# Altium PCB ES_PRJ_6C_2L_2026.PcbDoc
Units mm, origin at the board's own origin, x right, y up, seen from the top; angles counter-clockwise.
Board outline 120 x 60 mm, 2 copper layers (Top Layer, Bottom Layer), stack 1.62 mm thick; 67 components, 48 nets, 226 pads, 74 vias.
Unrouted connection lines stored in the file: 48.
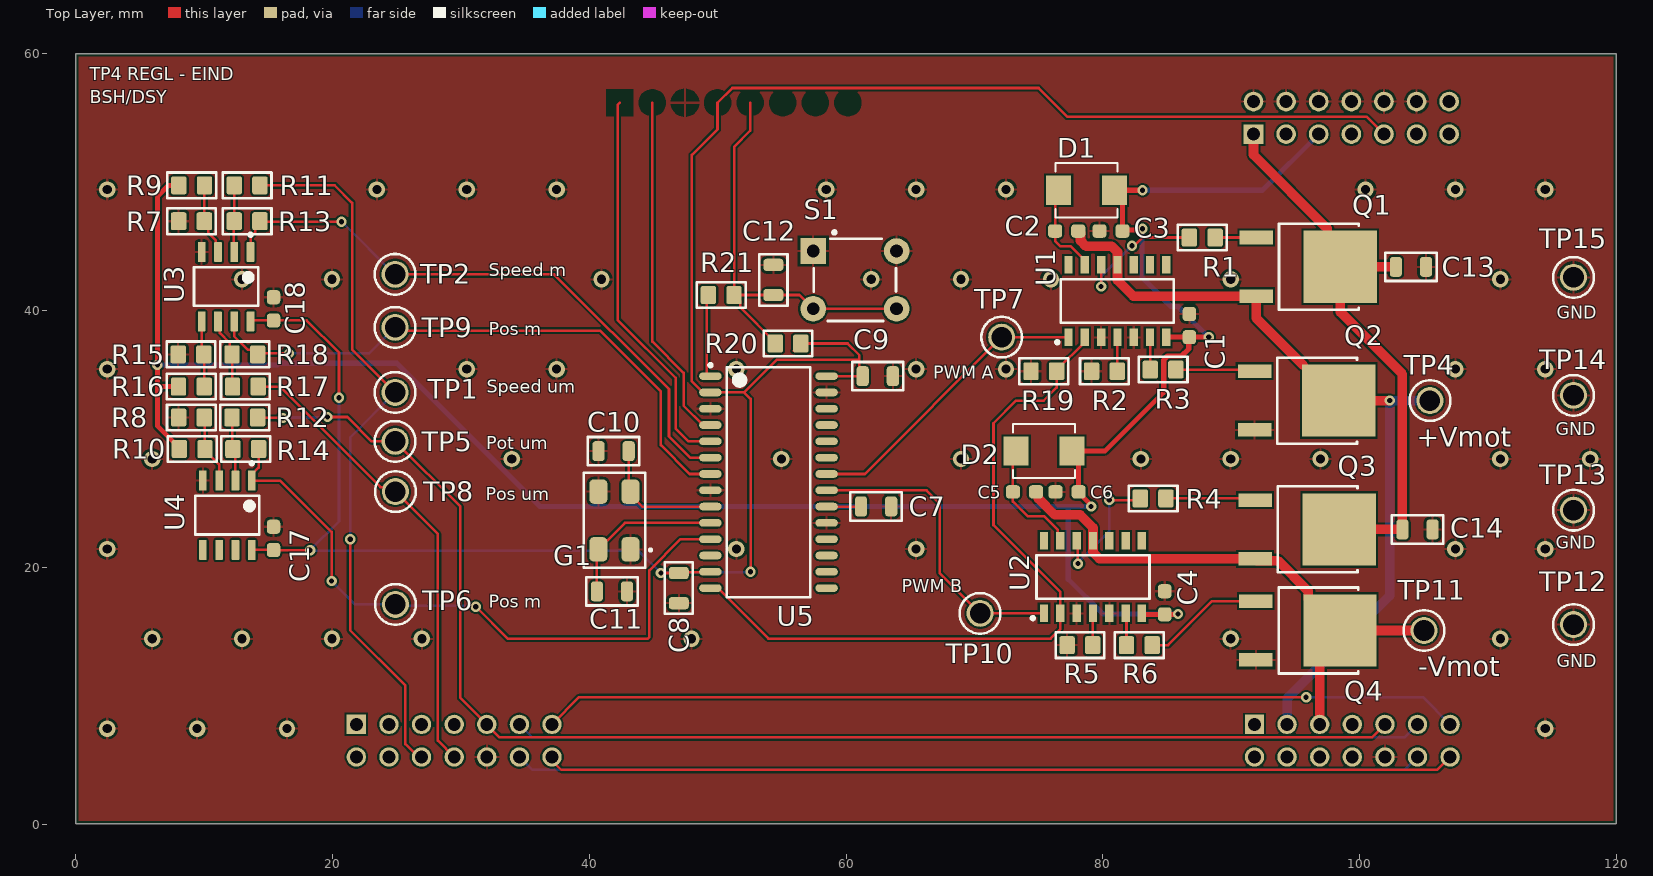
[diagram p0: Top Layer view]
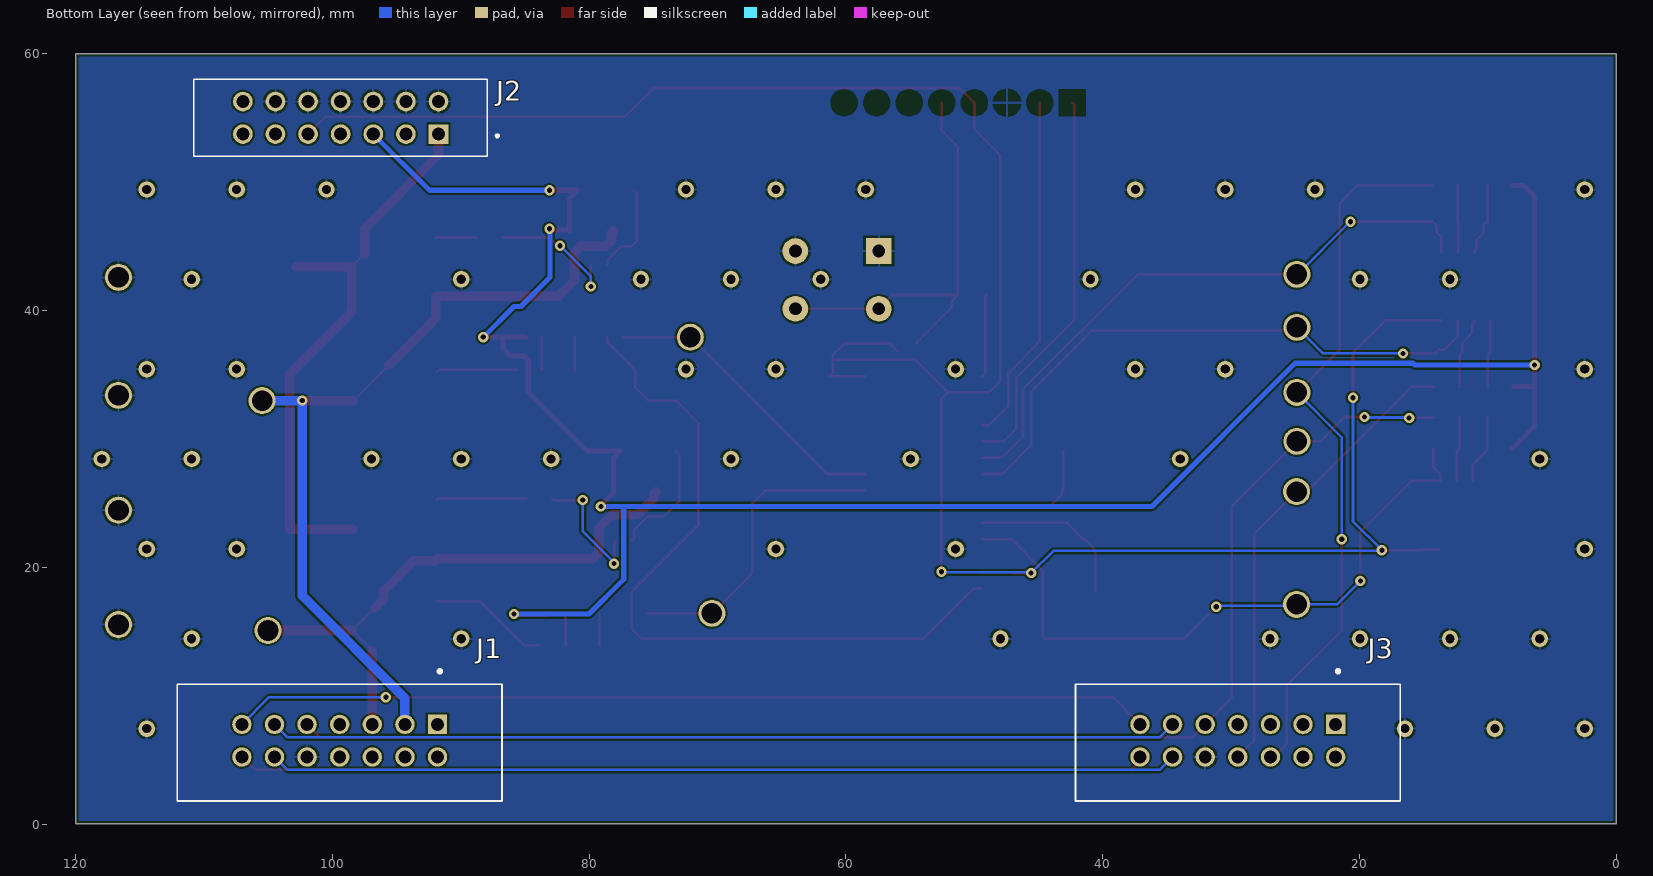
[diagram p1: Bottom Layer view, seen from below]
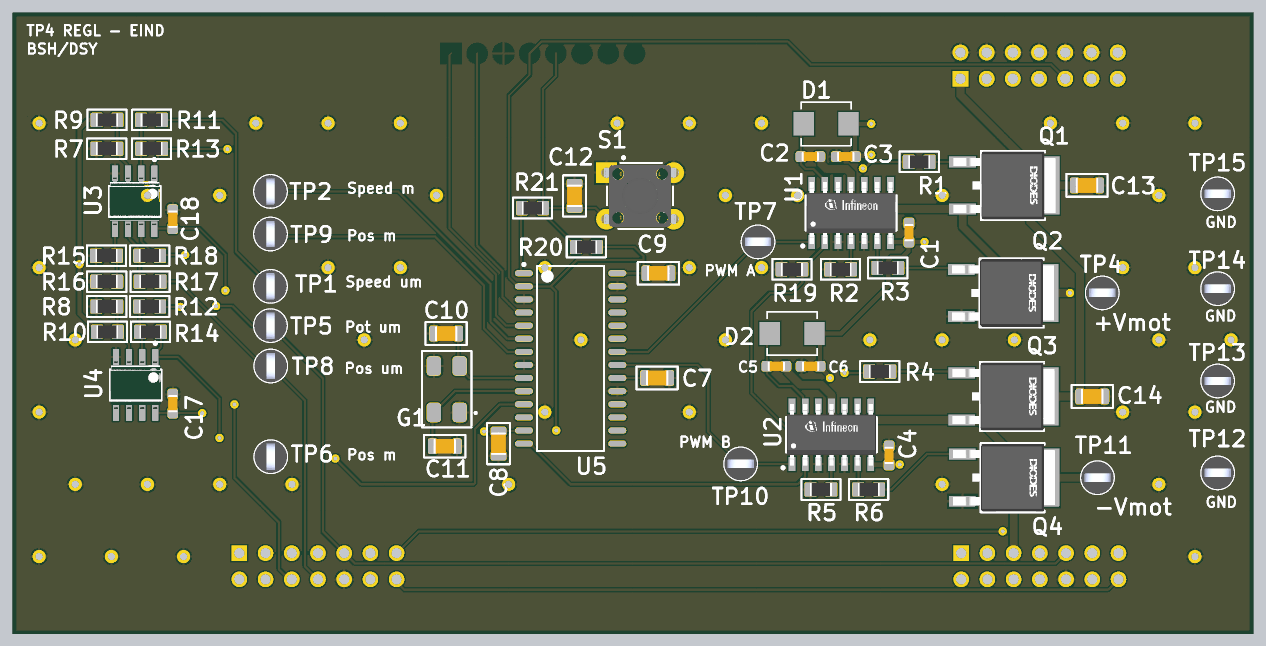
[diagram p2: 3D render of the assembled board from above, using the file's embedded part models]

## Layer stack, top to bottom
Top Solder: solder mask 0.0102, Solder Resist, Dk 3.5
Top Layer: signal copper 0.035
Dielectric1: core 1.55, FR-4, Dk 4.8
Bottom Layer: signal copper 0.035
Bottom Solder: solder mask 0.0102, Solder Resist, Dk 3.5

## Board outline
-0.013,0.001 -0.013,60.001 119.987,60.001 119.987,0.001

## Design rules (kind name [scope] priority, off if disabled: settings)
BoardOutlineClearance [All] p1: gap=0.25 ignorepadtopadclearanceinfootprint=FALSE except(0: Arc-SplitContinuation Track-SplitContinuation SMDPad-SplitContinuation THPad-SplitContinuation Via-SplitContinuation Fill-SplitContinuation Poly-SplitContinuation Region-SplitContinuation Text-SplitContinuation)
Clearance Clearance-xPP-xTP-xTT [All] p1: gap=0.151 ignorepadtopadclearanceinfootprint=FALSE
ComponentClearance [All] p1: gap=0.25 collisioncheckmode=3 verticalgap=0.25 showdistances=FALSE
DiffPairsRouting [All] p1: maxlimit=0.25 minlimit=0.25 mostfreqgap=0.25 toplayer_minwidth=0.381 toplayer_maxwidth=0.381 toplayer_prefwidth=0.381 bottomlayer_minwidth=0.381 bottomlayer_maxwidth=0.381 bottomlayer_prefwidth=0.381 maxuncoupledlength=12.5
Height [All] p1: minheight=0 maxheight=25 prefheight=12.5
HoleSize HoleSize-PTH [All] p1: absolutevalues=TRUE maxlimit=10 minlimit=0.25 maxpercent=80.000 minpercent=20.000
HoleToHoleClearance [All] p1: gap=0.35 allowstackedmicrovias=TRUE
MinimumAnnularRing "Minimum IAR  >0.45mm" [((ObjectKind = 'Pad') OR (ObjectKind = 'Via')) And (Layer = 'MultiLayer') And (HoleDiameter > AsMM(0.45))] p1: minimumring=0.175 // minimum inner annular ring for pads > 0.45mm finished hole size
MinimumAnnularRing "Minimum IAR <=0.45mm" [((ObjectKind = 'Pad') OR (ObjectKind = 'Via')) And (Layer = 'MultiLayer') And (HoleDiameter <= AsMM(0.45))] p2: minimumring=0.175 // minimum inner annular ring for pads <= 0.45mm finished hole size
MinimumSolderMaskSliver [All] p1: minsoldermaskwidth=0.08
PasteMaskExpansion [All] p1: expansion=-0.025
PlaneClearance PlaneClearance-IPI [All] p1: clearance=0.25
PlaneConnect [All] p1: planeconnectstyle=Relief reliefexpansion=0.175 reliefentries=4 reliefconductorwidth=0.2 reliefairgap=0.2
PolygonConnect PolygonConnect-xTW [All] p1: connectstyle=Relief reliefconductorwidth=0.2 reliefentries=4 polygonreliefangle="90 Angle" airgapwidth=0.2
RoutingCorners [All] p1: cornerstyle=45-Degree minsetback=2.5 maxsetback=2.5
RoutingVias RoutingViasES [All] p1: holewidth=0.4 width=0.8 viastyle="Through Hole" minholewidth=0.25 minwidth=0.61 maxholewidth=0.5 maxwidth=1 // finishet hole size <= 0.45mm
SilkToSilkClearance [All] p1: silktosilkclearance=0.2
SilkToSolderMaskClearance SilkscreenOverComponentPads [IsPad] p1: minsilkscreentomaskgap=0.2 clearancetoexposedcopper=TRUE
SolderMaskExpansion [All] p1: expansion=0 istentingtop=FALSE
SupplyNets "Schematic Supply Nets_6" [InNet('-15V')] p1: voltage=0.000
SupplyNets "Schematic Supply Nets_5" [InNet('+15V')] p2: voltage=0.000
SupplyNets "Schematic Supply Nets_4" [InNet('GND')] p3: voltage=0.000
SupplyNets "Schematic Supply Nets_3" [InNet('+5V')] p4: voltage=0.000
SupplyNets "Schematic Supply Nets_2" [InNet('-Vdc')] p5: voltage=0.000
SupplyNets "Schematic Supply Nets_1" [InNet('+3.3V')] p6: voltage=0.000
SupplyNets "Schematic Supply Nets" [InNet('+Vdc')] p7: voltage=0.000
UnRoutedNet [All] p1: checkbadconnections=TRUE
Width Width-xTW [All] p1: maxlimit=1.5 minlimit=0.15 preferedwidth=0.2
17 further rules are at their usual default settings.

## Classes and differential pairs
component class regulateur_de_tension: C17 C18 R7 R8 R9 R10 R11 R12 R13 R14 R15 R16 R17 R18 U3 U4
component class Mosfter_driver: C1 C2 C3 C4 C5 C6 C13 C14 D1 D2 Q1 Q2 Q3 Q4 R1 R2 R3 R4 R5 R6 U1 U2
component class MCU: 1 C7 C8 C9 C10 C11 C12 G1 R19 R20 R21 S1 SW1 U5 Y1
component class ES_PRJ_6C_2L_2026: J1 J2 J3 TP1 TP2 TP4 TP5 TP6 TP7 TP8 TP9 TP10 TP11 TP12 TP13 TP14 TP15

## Components (designator, comment, footprint, x,y, rotation, side; value= is the part's Value field where it differs from the comment)
C1 "100nF" CAPC1608X08M 86.732,38.82 r270 top
C2 "100nF" CAPC1608X08M 77.178,46.186 r0 top
C3 "100nF" CAPC1608X08M 80.622,46.186 r180 top
C4 "100nF" CAPC1608X08M 84.811,17.23 r270 top
C5 "100nF" CAPC1608X08M 73.889,25.866 r180 top
C6 "100nF" CAPC1608X08M 77.207,25.866 r180 top
C7 "10uF" CAPC2012X08M 62.332,24.732 r180 top value=10µF
C8 "100nF" CAPC2012X08M 46.965,18.373 r90 top
C9 "100nF" CAPC2012X08M 62.459,34.883 r180 top
C10 "100nF" CAPC2012X08M 41.885,29.041 r180 top
C11 "100nF" CAPC2012X08M 41.758,18.119 r0 top
C12 "100nF" CAPC2012X08M 54.331,42.376 r270 top
C13 "1uF" CAPC2012X08M 103.988,43.392 r180 top value=1µF
C14 "1uF" CAPC2012X08M 104.496,22.945 r180 top value=1µF
C17 "100nF" CAPC1608X08M 15.4,22.25 r270 top
C18 "100nF" CAPC1608X08M 15.4,40.125 r270 top
D1 "MBRS130LT3G" DIODE_SMB_2L_ONS 78.715,49.361 r0 top
D2 "MBRS130LT3G" DIODE_SMB_2L_ONS 75.413,29.041 r0 top
G1 "8MHz" OSC60X35X10 41.949,23.643 r90 top
J1 "SBH11-PBPC-D07-ST-BK" SULLINS_SBH11-PBPC-D07-ST-BK 99.42,6.49 r0 bottom
J2 "SFH11-PBPC-D07-ST-BK" SULLINS_SFH11-PBPC-D07-ST-BK 99.345,55 r180 bottom
J3 "SBH11-PBPC-D07-ST-BK" SULLINS_SBH11-PBPC-D07-ST-BK 29.47,6.49 r0 bottom
Q1 "DMN6068LK3-13" FP-TO252_DPAK-MFG 95.987,43.392 r270 top
Q2 "DMN6068LK3-13" FP-TO252_DPAK-MFG 95.86,32.978 r270 top
Q3 "DMN6068LK3-13" FP-TO252_DPAK-MFG 95.9,22.945 r270 top
Q4 "DMN6068LK3-13" FP-TO252_DPAK-MFG 95.954,15.071 r270 top
R1 "100R" RESC2012X06M 87.732,45.678 r0 top value=100
R2 "100k" RESC2012X06M 80.112,35.264 r180 top
R3 "100R" RESC2012X06M 84.684,35.391 r0 top value=100
R4 "100R" RESC2012X06M 83.906,25.358 r0 top value=100
R5 "100k" RESC2012X06M 78.207,13.928 r180 top
R6 "100R" RESC2012X06M 82.833,13.928 r0 top value=100
R7 "10k" RESC2012X06M 9.008,46.948 r0 top value=68k
R8 "10k" RESC2012X06M 9.005,31.661 r0 top value=68k
R9 "95k" RESC2012X06M 9.024,49.742 r0 top value=68k
R10 "95k" RESC2012X06M 9.064,29.201 r0 top value=68k
R11 "100k" RESC2012X06M 13.342,49.742 r180 top value=68k
R12 "100k" RESC2012X06M 13.164,31.661 r180 top value=68k
R13 "16k" RESC2012X06M 13.342,46.948 r180 top value=68k
R14 "16k" RESC2012X06M 13.239,29.201 r180 top value=68k
R15 "10k" RESC2012X06M 8.975,36.578 r0 top value=68k
R16 "95k" RESC2012X06M 9,34.07 r0 top value=68k
R17 "100k" RESC2012X06M 13.207,34.07 r180 top value=68k
R18 "16k" RESC2012X06M 13.166,36.578 r180 top value=68k
R19 "10k" RESC2012X06M 75.397,35.264 r0 top
R20 "10k" RESC2012X06M 55.474,37.423 r0 top
R21 "1k0" RESC2012X06M 50.267,41.201 r180 top value=1k
S1 "1P1T-P" TE_1825910-6 60.681,42.376 r0 top
TP1 "5011" KSTN-5011_V 24.867,33.613 r270 top
TP2 "5011" KSTN-5011_V 24.867,42.814 r270 top
TP4 "5011" KSTN-5011_V 105.468,32.978 r0 top
TP5 "5011" KSTN-5011_V 24.867,29.803 r270 top
TP6 "5011" KSTN-5011_V 24.894,17.103 r270 top
TP7 "5011" KSTN-5011_V 72.111,37.92 r0 top
TP8 "5011" KSTN-5011_V 24.894,25.893 r270 top
TP9 "5011" KSTN-5011_V 24.867,38.683 r270 top
TP10 "5011" KSTN-5011_V 70.428,16.406 r0 top
TP11 "5011" KSTN-5011_V 105.004,15.071 r0 top
TP12 "5011" KSTN-5011_V 116.65,15.535 r0 top
TP13 "5011" KSTN-5011_V 116.65,24.442 r0 top
TP14 "5011" KSTN-5011_V 116.65,33.386 r0 top
TP15 "5011" KSTN-5011_V 116.65,42.574 r0 top
U1 "IR21844S" SOIC127P600X175-14N-12-V 81.128,40.725 r90 top
U2 "IR21844S" SOIC127P600X175-14N-12-V 79.223,19.231 r90 top
U3 "LM6132BIMX/NOPB" FP-LM6132BIMX-NOPB-MFG 11.707,41.85 r270 top
U4 "LM6132BIMX/NOPB" FP-LM6132BIMX-NOPB-MFG 11.8,24.05 r270 top
U5 "PIC32MX130F064B-I/SO" MCHP-SOIC-SO28_L 53.95,26.628 r0 top

## Footprints (in the part's own frame and the unit in brackets; to place one, negate y for a bottom-side part, rotate by r counter-clockwise, add the part's x,y. Pads: shape width x height; smd on the part's side, far side on the other; paste and mask are expansions set on the pad)
CAPC1608X08M [mm] "Chip Capacitor, 2-Leads, Body 1.60x0.80mm, IPC Low Density"
  rrect50% 1.1x1.05 smd: 1(-0.9,0) 2(0.9,0)
  body extent -0.85,-0.45 0.85,0.45, height 0.8
CAPC2012X08M [mm] "Chip Capacitor, 2-Leads, Body 2.00x1.25mm, IPC Low Density"
  rrect50% 0.95x1.55 smd: 1(-1.175,0) 2(1.175,0)
  silkscreen extent -2,-1.1 2,1.1, body extent -1.1,-0.72 1.1,0.72, height 0.85
DIODE_SMB_2L_ONS [mil]
  rect 77x89 smd paste+0 mask+0: 1(-85.5,0) 2(85.5,0)
  silkscreen extent -96,-83 96,83
FP-LM6132BIMX-NOPB-MFG [mm]
  rrect17% 1.55x0.6 smd paste+0 mask+0: 1(-2.7,1.905) 2(-2.7,0.635) 3(-2.7,-0.635) 4(-2.7,-1.905) 5(2.7,-1.905) 6(2.7,-0.635) 7(2.7,0.635) 8(2.7,1.905)
  silkscreen extent -4.17,-2.5 1.5,2.5, body extent -3.57,-2.75 3.57,2.75, height 0.25
FP-TO252_DPAK-MFG [mm]
  rect 1.06x2.6 smd paste+0 mask+0: 1(-2.286,-4.05) 3(2.286,-4.05)
  rect 5.632x5.7 smd paste+0 mask+0: 4(0,2.5)
  silkscreen extent -3.35,-2.27 3.35,3.93, body extent -3.45,-5.45 3.45,5.45, height 0.25
KSTN-5011_V [mm] "Test Point, Dia 3.17mm"
  round 2.1 hole 1.6: 1(0,0)
  silkscreen extent -1.58,-1.59 1.58,1.59, body extent -1.59,-1.59 1.59,1.59, height 8.13
MCHP-SOIC-SO28_L [mm] "SOIC, 28-Leads, Body 17.9x7.5mm, Pitch 1.27mm, IPC High Density"
  oval 1.75x0.6 smd: 1(-4.525,8.255) 2(-4.525,6.985) 3(-4.525,5.715) 4(-4.525,4.445) 5(-4.525,3.175) 6(-4.525,1.905) 7(-4.525,0.635) 8(-4.525,-0.635) 9(-4.525,-1.905) 10(-4.525,-3.175) 11(-4.525,-4.445) 12(-4.525,-5.715) 13(-4.525,-6.985) 14(-4.525,-8.255) 15(4.525,-8.255) 16(4.525,-6.985) 17(4.525,-5.715) 18(4.525,-4.445) 19(4.525,-3.175) 20(4.525,-1.905) 21(4.525,-0.635) 22(4.525,0.635) 23(4.525,1.905) 24(4.525,3.175) 25(4.525,4.445) 26(4.525,5.715) 27(4.525,6.985) 28(4.525,8.255)
  silkscreen extent -4.65,-8.95 3.25,9.23, body extent -3.75,-8.95 3.75,8.95, height 2.65
OSC60X35X10 [mm] "6.0x3.5mm Oscillator"
  rrect50% 1.9x1.4 smd: 1(-2.25,-1.25) 2(2.25,-1.25) 3(2.25,1.25) 4(-2.25,1.25)
  silkscreen extent -3.7,-2.9 3.7,2.4, body extent -3,-1.8 3,1.8, height 1
RESC2012X06M [mm] "Chip Resistor, 2-Leads, Body 2.00x1.25mm, IPC Low Density"
  rrect25% 1.2x1.4 smd: 1(-1,0) 2(1,0)
  silkscreen extent -1.9,-1 1.9,1, body extent -1.05,-0.63 1.05,0.63, height 0.6
SOIC127P600X175-14N-12-V [mm] "SOIC,1.27mm,pitch;14 pin,3.90mm W X 8.65mm L X 1.75mm H body"
  rect 1.35x0.65 smd paste+0 mask+0: 1(-2.825,3.81) 2(-2.825,2.54) 3(-2.825,1.27) 4(-2.825,0) 5(-2.825,-1.27) 6(-2.825,-2.54) 7(-2.825,-3.81) 8(2.825,-3.81) 9(2.825,-2.54) 10(2.825,-1.27) 11(2.825,0) 12(2.825,1.27) 13(2.825,2.54) 14(2.825,3.81)
  silkscreen extent -3.32,-4.4 1.7,4.81, body extent -3,-4.32 3,4.33, height 1.56
SULLINS_SBH11-PBPC-D07-ST-BK [mm]
  rect 1.508x1.508 hole 1: 1(-7.62,-1.27)
  round 1.508 hole 1: 2(-7.62,1.27) 3(-5.08,-1.27) 4(-5.08,1.27) 5(-2.54,-1.27) 6(-2.54,1.27) 7(0,-1.27) 8(0,1.27) 9(2.54,-1.27) 10(2.54,1.27) 11(5.08,-1.27) 12(5.08,1.27) 13(7.62,-1.27) 14(7.62,1.27)
  silkscreen extent -12.64,-5.5 12.64,4.7
SULLINS_SFH11-PBPC-D07-ST-BK [mm]
  rect 1.53x1.53 hole 1.02: 1(7.62,-1.27)
  round 1.53 hole 1.02: 2(7.62,1.27) 3(5.08,-1.27) 4(5.08,1.27) 5(2.54,-1.27) 6(2.54,1.27) 7(0,-1.27) 8(0,1.27) 9(-2.54,-1.27) 10(-2.54,1.27) 11(-5.08,-1.27) 12(-5.08,1.27) 13(-7.62,-1.27) 14(-7.62,1.27)
  silkscreen extent -11.43,-3 12.3,3
TE_1825910-6 [mm] "Switch Tactile OFF (ON) SPST Round Button PC Pins 0.05A 24VDC 1.57N Thru-Hole Loose Piece"
  rect 2x2 hole 1 paste-2539.97 mask+0: 13(-3.25,2.25)
  round 2 hole 1 paste-2539.97 mask+0: 13(3.25,2.25) 14(-3.25,-2.25) 14(3.25,-2.25)
  silkscreen extent -3.2,-3.2 3.2,3.82, body extent -4.12,-3.24 4.12,3.24, height 0.25

## Part data
C1 C2 C3 C4 C5 C6 C17 C18: library part CMP-065-000000-2, "CAPC 100nF X7R 50V 10% 1608 (0603 INCH)", CURRENT=NULL, Dielectric=X7R, Manufacturer=TDK, Manufacturer Number=CGA3E2X7R1H104K080AA, Supplier Part Number 1="FAB.0603_C 100n", TemperatureRange="-55°C to +125°C", Tolerance=±10%, VOLTAGE=50V, Category=Passives, IsStocked=1, PN=PN-338083, Power=NULL, SubCategory="Condensateurs ceramique", Supplier 1=ETML, Supplier Price 1=0.0100, TemperatureCoeff=NULL
C7: library part CMP-065-000040-2, "CAPC 10uF X5R 16V 10% 2012 (0805 INCH)", Dielectric=X5R, Manufacturer=TDK, Manufacturer Number=C2012X5R1C106K085AC, Supplier Part Number 1="FAB.0805_C 10u", TemperatureRange="-55°C to +85°C", Tolerance=±10%, VOLTAGE=16V, Category=Passives, IsStocked=1, PN=PN-654987, SubCategory="Condensateurs ceramique", Supplier 1=ETML, Supplier Price 1=0.0360
C8 C9 C10 C11 C12: library part CMP-065-000038-2, "CAPC 100nF X7R 50V 10% 2012 (0805 INCH)", Dielectric=X7R, Manufacturer=TDK, Manufacturer Number=C2012X7R1H104K085AA, Supplier Part Number 1="FAB.0805_C 100n", TemperatureRange="-55°C to +125°C", Tolerance=±10%, VOLTAGE=50V, Category=Passives, IsStocked=1, PN=PN-747862, SubCategory="Condensateurs ceramique", Supplier 1=ETML, Supplier Price 1=0.0200
C13 C14: library part CMP-065-000041-2, "CAPC 1uF X5R 25V 10% 2012 (0805 INCH)", Dielectric=X5R, Manufacturer=TDK, Manufacturer Number=C2012X5R1E105K125AA, Supplier Part Number 1="FAB.0805_C 1u", TemperatureRange="-55°C to +85°C", Tolerance=±10%, VOLTAGE=25V, Category=Passives, IsStocked=1, PN=PN-324029, SubCategory="Condensateurs ceramique", Supplier 1=ETML, Supplier Price 1=0.0223
D1 D2: "Description", Manufacturer_Name=onsemi, Copyright="Copyright (C) 2025 Ultra Librarian. All rights reserved.", Manufacturer_Part_Number=MBRS130LT3G
G1: library part CMP-059-000009-3, "CRYSTAL 8MHz 6.0x3.5mm", Manufacturer="Farnell Multicomp", Manufacturer Number=ILCX08-JH5F18-8.000MHZ, Supplier Part Number 1=3572991, TemperatureCoeff=±30ppm, TemperatureRange="-20°C to +70°C", Category=IntegratedCircuits, IsStocked=0, PN=PN-881279, SubCategory=Horloges, Supplier 1=Farnell, Supplier Price 1=0.45, Tolerance=±30ppm
J1 J3: "Connector Header Through Hole 14 position 0.100 (2.54mm)", Package=None, Availability=Warning, Check_prices=https://www.snapeda.com/parts/SBH11-PBPC-D07-ST-BK/Sullins%20Connector%20Solutions/view-part/229418/?ref=eda, MF="Sullins Connector", MP=SBH11-PBPC-D07-ST-BK, Price=None, Purchase-URL=https://pricing.snapeda.com/search/part/SBH11-PBPC-D07-ST-BK/?ref=eda, SnapEDA_Link=https://www.snapeda.com/parts/SBH11-PBPC-D07-ST-BK/Sullins%20Connector%20Solutions/view-part/229418/?ref=snap
J2: "14 Position Header Connector Through Hole", Package=None, Availability=Warning, Check_prices=https://www.snapeda.com/parts/SFH11-PBPC-D07-ST-BK/Sullins%20Connector%20Solutions/view-part/851415/?ref=eda, MF="Sullins Connector", MP=SFH11-PBPC-D07-ST-BK, Price=None, Purchase-URL=https://pricing.snapeda.com/search/part/SFH11-PBPC-D07-ST-BK/?ref=eda, SnapEDA_Link=https://www.snapeda.com/parts/SFH11-PBPC-D07-ST-BK/Sullins%20Connector%20Solutions/view-part/851415/?ref=snap
Q1 Q2 Q3 Q4: library part CMP-12801-000004-1, "MOSFET N-CH 60V 6A DPAK", Continuous Drain Current=6A, Drain To Source Breakdown Voltage=60V, Drain To Source Resistance=0.068Ω, Gate To Source Voltage=20V, Input Capacitace At Vds="502pF @ 30V", Manufacturer="Diodes Inc.", Max Forward Diode Voltage=1.15V, Max Junction Temp=+150°C, Package="TO252 (DPAK)", Power Dissipation=2.12W, Pulse Drain Current=22.2A, Temperature="-55°C to +150°C", Temperature Range Low=-55°C, Typ Forward Diode Voltage=0.98V, Automotive=Yes, Automotive Grade="Grade 0", Category=Trans, ComponentLink2Description=Datasheet, ComponentLink2URL=https://www.diodes.com/assets/Datasheets/DMN6068LK3.pdf, Depletion Mode=False, Device Class L1="Discrete Semiconductors", Device Class L2=Transistors, Device Class L3=MOSFETs, Digikey Description="MOSFET N-CH 60V 6A DPAK", Drain To Source Voltage=60V, Footprint Url=https://www.diodes.com/assets/Package-Files/TO252-DPAK.pdf, Gate Charge At Vgs="10.3nC @ 10V", Height=2.52mm, Lead Free=Yes, Manufacturer Part Number=DMN6068LK3-13, Mouser Description="Supplied as a Tape, N-Channel MOSFET, 8.5 A, 60 V, 3-Pin DPAK Diodes Inc DMN6068LK3-13", Number of Channels=1, Number Of N Channels=1, Octopart=https://octopart.com/dmn6068lk3-13-diodes+inc.-17947797, Reverse Recovery Charge=929nC, Reverse Recovery Time=145ns, RoHS=TRUE, Rthja Max=59°C/W, Standoff Height=0mm, Temperature Range High=+150°C, Threshold Vgs Max=3V, Threshold Vgs Min=1V, Transconductance=19.7S, Turn Off Delay Time=11.9ns, Turn On Delay Time=3.6ns
R1 R3 R4 R6: library part CMP-066-000175-2, "RES 100ohm  ±1% 0.125W 2012 (0805 INCH)", Manufacturer=Yageo, Manufacturer Number=RC0805FR-07100RL, Power=0.125W, Supplier Part Number 1="FAB.0805_R 100R", TemperatureCoeff=±200ppm/°C, TemperatureRange="-55°C to 155°C", Tolerance=±1%, VOLTAGE=150V, Category=Passives, IsStocked=1, PN=PN-217910, SubCategory="Resistances couche epaisse", Supplier 1=ETML, Supplier Price 1=0.0200
R2 R5: library part CMP-066-000211-2, "RES 100kohm  ±1% 0.125W 2012 (0805 INCH)", Manufacturer=Yageo, Manufacturer Number=RC0805FR-07100KL, Power=0.125W, Supplier Part Number 1="FAB.0805_R 100k", TemperatureCoeff=±200ppm/°C, TemperatureRange="-55°C to 155°C", Tolerance=±1%, VOLTAGE=150V, Category=Passives, IsStocked=1, PN=PN-903408, SubCategory="Resistances couche epaisse", Supplier 1=ETML, Supplier Price 1=0.0200
R7 R8 R9 R10 R11 R12 R13 R14 R15 R16 R17 R18: library part CMP-066-000209-2, "RES 68kohm  ±1% 0.125W 2012 (0805 INCH)", Manufacturer=Yageo, Manufacturer Number=RC0805FR-0768KL, Power=0.125W, Supplier Part Number 1="FAB.0805_R 68k", TemperatureCoeff=±200ppm/°C, TemperatureRange="-55°C to 155°C", Tolerance=±1%, VOLTAGE=150V, Category=Passives, IsStocked=1, PN=PN-665325, SubCategory="Resistances couche epaisse", Supplier 1=ETML, Supplier Price 1=0.0200
R19 R20: library part CMP-066-000199-2, "RES 10kohm  ±1% 0.125W 2012 (0805 INCH)", Manufacturer=Yageo, Manufacturer Number=RC0805FR-0710KL, Power=0.125W, Supplier Part Number 1="FAB.0805_R 10k", TemperatureCoeff=±200ppm/°C, TemperatureRange="-55°C to 155°C", Tolerance=±1%, VOLTAGE=150V, Category=Passives, IsStocked=1, PN=PN-374909, SubCategory="Resistances couche epaisse", Supplier 1=ETML, Supplier Price 1=0.0200
R21: library part CMP-066-000187-2, "RES 1.0kohm  ±1% 0.125W 2012 (0805 INCH)", Manufacturer=Yageo, Manufacturer Number=RC0805FR-071KL, Power=0.125W, Supplier Part Number 1="FAB.0805_R 1k0", TemperatureCoeff=±200ppm/°C, TemperatureRange="-55°C to 155°C", Tolerance=±1%, VOLTAGE=150V, Category=Passives, IsStocked=1, PN=PN-746409, SubCategory="Resistances couche epaisse", Supplier 1=ETML, Supplier Price 1=0.0200
S1: library part CMP-058-000005-2, "SW 600X600X500 24V 50mA THT", CURRENT=50mA, Manufacturer="TE Connectivity", Manufacturer Number=1825910-6, Supplier Part Number 1=135-66-547, TemperatureRange="-35°C to +85 °C", VOLTAGE=24V, Category=Electromechanical, IsStocked=True, PN=PN-638027, SubCategory=Commutateurs, Supplier 1="Distrelec AG", Supplier Price 1=0.1642
TP1 TP2 TP4 TP5 TP6 TP7 TP8 TP9 TP10 TP11 TP12 TP13 TP14 TP15: library part CMP-1672-00003-4, "Test Point, Black, Through Hole, RoHS, Bulk", Colour=Black, Manufacturer=Keystone, Package Quantity=100, ComponentLink1Description="Manufacturer URL", ComponentLink1URL=http://www.keyelco.com/, ComponentLink2Description=Datasheet, ComponentLink2URL=http://www.keyelco.com/product-pdf.cfm?p=1320, Contact Material=Bronze, Contact Plating=Silver, DatasheetVersion="Rev. F, 12/2013", Height="8.12 mm", Mount="Through Hole", Mounting Technology="Through Hole", PackageDescription="1-Pin Through Hole Device, Dia 3.17 mm", PackageReference=5011, Packaging=Bulk, Pins=1, REACH SVHC="No SVHC", RoHSCompliant=true
U1 U2: "Half-bridge gate driver with integrated bootstrap diode", Alternate View=No, Multiple Parts=No, Symbol Type="Half-bridge gate driver with integrated bootstrap diode"
U3 U4: library part CMP-04895-000003-1, "IC OPAMP GP 2 CIRCUIT 8SOIC", Input Bias Current=0.125uA, Input Offset Voltage=1.7V, Manufacturer="Texas Instruments", Max Dual Supply Voltage=12V, Max Junction Temp=+150°C, Max Supply Voltage=24V, Min Dual Supply Voltage=0.9V, Min Supply Voltage=1.8V, Nominal Supply Current=720uA, Output Current Per Channel=3.5mA, Package=SOIC-8, Temperature="-40°C to +85°C", Temperature Range High=+85°C, Temperature Range Low=-40°C, Voltage Gain=102V/mV, Automotive=No, Category=IC, ComponentLink2Description=Datasheet, ComponentLink2URL=http://www.ti.com/lit/ds/symlink/lm6132.pdf, Device Class L1="Integrated Circuits (ICs)", Device Class L2="Linear ICs", Device Class L3="Amplifiers - Op Amps", Digikey Description="IC OPAMP GP 2 CIRCUIT 8SOIC", Gain Bandwidth=11MHz, Height=1.75mm, Lead Free=Yes, Manufacturer Part Number=LM6132BIMX/NOPB, Mouser Description="Operational Amplifiers - Op Amps DUAL LOW POWER 10 MHZ RRIO OP AMP", Number of Channels=2, Octopart=https://octopart.com/lm6132bimx%2Fnopb-texas+instruments-24814947, RoHS=TRUE, Standoff Height=0.11mm
U5: library part CMP-0048-00454-1, "32-bit Microcontroller with Audio and Graphics Interface, USB and Advanced Analog, 40 MHz, 21 I/O, PMP, -40 to 85 degC, 28-pin SOIC (SO28), Tube", Manufacturer=Microchip, ComponentLink1Description="Manufacturer URL", ComponentLink1URL=http://www.microchip.com, ComponentLink2Description=Datasheet, ComponentLink2URL=http://ww1.microchip.com/downloads/en/DeviceDoc/61168E.pdf, ComponentLink3Description="Package Specification", ComponentLink3URL=http://www.microchip.com/stellent/groups/techpub_sg/documents/packagingspec/en012702.pdf, ComponentLink4Description="Product URL", ComponentLink4URL=http://www.microchip.com/PIC32MX130F064B, DatasheetVersion="Rev. E", Mounting Technology="Surface Mount", PackageDescription="28-Lead Plastic Small Outline, 17.9 x 7.5 mm Body, 1.27 mm Pitch", PackageReference=SOIC-SO28, PackageVersion=C04-052C, PartNumber=PIC32MX130F064B-I/SO

## Via types
v1: diameter 1.27, hole 0.711, Top Layer to Bottom Layer, 51 vias
v2: diameter 0.8, hole 0.4, Top Layer to Bottom Layer, 23 vias

## Nets (pads, with @x,y where several pads share a name; then routed paths per layer and width w, separated by ;. In a path a pad name is that pad's centre, name@x,y a point inside that pad or via, vN(x,y) a via of type N, cw(c..) or ccw(c..) an arc to the next point about the centre after c; other vN are vias at no path point)
+3.3V: C8.2 C9.2 C17.2 C18.2 J2.9 R20.2 U3.8 U4.8 U5.2 U5.13 U5.28 | length 182.9
  Top Layer w0.2: U3.8 13.687,39.225 C18.2 17.985,39.225 20.5,36.71 v2(20.5,33.2) ; U4.8@13.749,21.328 13.771,21.35 C17.2 15.413,21.338 18.237,21.338 v2(18.25,21.325) ; v2(45.568,19.548) C8.2 47.012,19.596 49.378,19.596 U5.13 ; v2(52.553,19.643) 52.553,33.105 52.045,33.613 ; R20.2@55.905,36.854 55.978,36.854 56.474,37.35 R20.2 60.116,37.423 61.03,36.509 61.03,36.153 ; U5.28 C9.2@61.03,34.883 ; C9.2 61.03,35.137 61.03,36.153 ; J2.9 100.515,55.1 77.212,55.1 74.986,57.326 51.131,57.326 49.98,56.175 49.98,54.105 47.981,52.106 47.981,34.482 48.85,33.613 U5.2 52.045,33.613 ; 52.045,33.613 54.585,36.153 61.03,36.153
  Bottom Layer w0.2: v2(20.5,33.2) 20.5,23.575 v2(18.25,21.325) 18.296,21.279 43.837,21.279 v2(45.568,19.548) 45.615,19.596 52.506,19.596 v2(52.553,19.643)
+5V: J2.11
+15V: C1.2 C3.1 C4.2 C6.1 D1.2 D2.2 J2.5 R9.1 R10.1 R16.1 U1.7 U2.7 | length 176.5
  Top Layer w0.4: R16.1 6.35,34.07 ; R9.1 7.214,49.742 6.35,48.878 6.35,34.07 ; R10.1 8.064,29.301 6.35,31.015 6.35,34.07 ; v2(79.082,24.732) 79.082,24.828 78.107,25.803 78.107,28.519 D2.2 80.147,29.041 84.733,33.627 84.733,36.149 85.026,36.442 86.118,36.442 86.68,37.004 86.68,37.868 C1.2 ; U2.7 83.109,16.33 C4.2 85.819,16.33 v2(85.844,16.355) ; v2(83.083,46.359) 82.996,46.273 81.608,46.273 C3.1 81.522,48.726 D1.2 v2(83.083,49.361) ; U1.7 84.958,37.92 C1.2 ; v2(88.24,37.92) C1.2
  Bottom Layer w0.4: v2(6.35,35.75) 15.695,35.75 15.828,35.883 25.01,35.883 36.161,24.732 77.323,24.732 ; v2(79.082,24.732) 77.323,24.732 ; v2(83.083,46.359) 83.033,46.309 83.033,42.583 85.307,40.309 85.851,40.309 v2(88.24,37.92) ; v2(83.083,49.361) 92.436,49.361 J2.5 ; v2(85.844,16.355) 80.008,16.355 77.302,19.06 77.302,24.711 77.323,24.732
+Vdc: C13.2 C14.2 J2.1 Q1.4 Q3.4 | length 44.8
  Top Layer w0.2: Q1.4@97.459,44.42 Q1.4
  Top Layer w0.75: J2.1 91.725,52.125 97.459,46.391 Q1.4@97.459,44.42 ; Q3.4 C14.2 103.321,35.042 98.487,39.876 Q1.4 C13.2
-15V: J2.7
-Vdc: J2.3
AmesPU: J3.8 R17.1 TP8.1 | length 36.6
  Top Layer w0.2: R17.1 15.905,34.07 23.733,26.242 24.545,26.242 28.2,22.587 28.2,6.49 J3.8
GND: C1.1 C3.2 C4.1 C6.2 C7.1 C8.1 C9.1 C10.2 C11.2 C12.1 C13.1 C14.1 C17.1 C18.1 G1.1 G1.3 J1.10 J2.2 J2.4 J2.6 J2.8 J2.10 J2.12 J3.10 Q2.3 Q4.3 R2.2 R5.2 R7.1 R8.1 R15.1 R19.1 S1.13 TP12.1 TP13.1 TP14.1 TP15.1 U1.3 U1.5 U2.3 U2.5 U3.4 U4.4 U5.3 U5.8 U5.19 U5.27
  other v1: 2.45,7.425 9.45,7.425 16.45,7.425 114.45,7.425 5.95,14.425 12.95,14.425 19.95,14.425 26.95,14.425 47.95,14.425 89.95,14.425 110.95,14.425 2.45,21.425 51.45,21.425 65.45,21.425 107.45,21.425 114.45,21.425 5.95,28.425 33.95,28.425 54.95,28.425 68.95,28.425 82.95,28.425 89.95,28.425 96.95,28.425 110.95,28.425 117.95,28.425 2.45,35.425 30.45,35.425 37.45,35.425 51.45,35.425 65.45,35.425 72.45,35.425 107.45,35.425 114.45,35.425 12.95,42.425 19.95,42.425 40.95,42.425 61.95,42.425 68.95,42.425 75.95,42.425 89.95,42.425 110.95,42.425 2.45,49.425 23.45,49.425 30.45,49.425 37.45,49.425 58.45,49.425 65.45,49.425 72.45,49.425 100.45,49.425 107.45,49.425 114.45,49.425
ImesPU: J3.4
M\C\L\R\: R21.2 U5.1 | length 6.6
  Top Layer w0.2: R21.2@49.013,41.233 49.157,41.089 49.157,35.068 49.341,34.883 U5.1
NetC2_1: C2.1 D1.1 U1.13 | length 7.4
  Top Layer w0.2: D1.1 76.278,49.096 C2.1 76.278,45.398 76.683,44.993 77.495,44.993 78.588,43.9 U1.13
NetC5_2: C5.2 D2.1 U2.13 | length 9.4
  Top Layer w0.2: D2.1 72.989,28.789 C5.2 72.989,25.113 74.128,23.974 75.4,23.974 76.488,22.886 76.488,22.251 U2.13
NetC7_2: C7.2 U5.20 | length 2.5
  Top Layer w0.2: U5.20 C7.2@60.93,24.723
NetQ1_1: Q1.1 R1.2 | length 3.2
  Top Layer w0.2: R1.2 Q1.1
NetQ2_1: Q2.1 R3.2 | length 6.2
  Top Layer w0.2: R3.2 91.683,35.391 Q2.1
NetQ3_1: Q3.1 R4.2 | length 7
  Top Layer w0.2: R4.2 91.723,25.358 Q3.1
NetQ4_1: Q4.1 R6.2 | length 9.5
  Top Layer w0.2: R6.2 85.065,13.928 88.494,17.357 Q4.1
NetR1_1: R1.1 U1.12 | length 10.6
  Top Layer w0.2: v2(79.858,41.868) U1.12 ; v2(82.271,45.043) 82.448,45.043 83.083,45.678 R1.1
  Bottom Layer w0.2: v2(79.858,41.868) 79.858,42.63 v2(82.271,45.043)
NetR2_1: R2.1 U1.4 | length 2.6
  Top Layer w0.2: R2.1 81.112,37.884 U1.4
NetR3_1: R3.1 U1.6 | length 2.5
  Top Layer w0.2: U1.6 83.684,37.884 R3.1
NetR4_1: R4.1 U2.12 | length 10.2
  Top Layer w0.2: U2.12 78.053,21.956 v2(78.053,20.278) ; v2(80.493,25.231) 82.779,25.231 R4.1
  Bottom Layer w0.2: v2(78.053,20.278) 78.053,20.378 80.493,22.818 v2(80.493,25.231)
NetR5_1: R5.1 U2.4 | length 2.5
  Top Layer w0.2: R5.1 79.207,16.39 U2.4
NetR6_1: R6.1 U2.6 | length 2.5
  Top Layer w0.2: U2.6 81.833,16.336 R6.1
NetR7_2: R7.2 R9.2 U3.3 | length 5.7
  Top Layer w0.2: R7.2 10.304,46.652 10.304,46.065 10.911,45.458 10.911,44.711 U3.3 ; R7.2@10.016,46.84 10.016,46.948 10.016,49.734 R9.2
NetR8_2: R8.2 R10.2 U4.3 | length 5.4
  Top Layer w0.2: R8.2@9.997,31.669 R8.2 10.034,31.632 10.034,29.231 R10.2 10.064,29.101 11.165,28 U4.3
NetR11_2: R11.2 R13.2 U3.2 | length 5.2
  Top Layer w0.2: U3.2 12.3,44.592 12.3,46.906 R13.2 R11.2
NetR12_2: R12.2 R14.2 U4.2 | length 5
  Top Layer w0.2: R12.2 12.201,31.624 12.201,29.238 R14.2 12.435,29.005 U4.2
NetR13_1: R13.1 TP2.1 U3.1 U5.6 | length 47.6
  Top Layer w0.2: U3.1 13.612,45.71 13.97,46.068 13.97,46.576 R13.1 14.384,46.906 v2(20.7,46.906) ; TP2.1 37.256,42.814 46.203,33.867 46.203,30.184 47.854,28.533 U5.6
  Bottom Layer w0.2: v2(20.7,46.906) 20.737,46.906 24.83,42.814 TP2.1
NetR14_1: R14.1 TP6.1 U4.1 U5.11 | length 52
  Top Layer w0.2: R14.1 14.239,27.759 13.705,27.225 U4.1 15.921,26.75 19.925,22.746 v2(19.925,18.925) ; v2(31.15,16.925) 33.639,14.436 44.562,14.436 44.679,14.553 44.679,19.755 47.107,22.183 U5.11
  Bottom Layer w0.2: v2(19.925,18.925) 21.747,17.103 TP6.1@24.867,17.103 ; TP6.1 24.983,17.014 31.061,17.014 v2(31.15,16.925)
NetR15_2: R15.2 R16.2 U3.5 | length 5.2
  Top Layer w0.2: U3.5 9.802,36.751 R15.2 9.988,36.566 9.988,34.083 R16.2
NetR17_2: R17.2 R18.2 U3.6 | length 5.6
  Top Layer w0.2: U3.6 11.221,39.001 11.221,38.229 11.989,37.461 11.989,36.755 R18.2 12.187,36.558 12.187,34.091 R17.2 R17.2@12.199,34.062
NetR18_1: R18.1 TP9.1 U3.7 U5.7 | length 46.8
  Top Layer w0.2: U3.7 12.342,37.983 13.383,36.942 13.802,36.942 R18.1 14.238,36.65 v2(16.6,36.65) ; TP9.1@24.867,38.428 40.839,38.428 45.568,33.699 45.568,29.507 47.812,27.263 U5.7
  Bottom Layer w0.2: v2(16.6,36.65) 22.834,36.65 TP9.1
NetR19_2: R19.2 U1.2 U2.2 U5.14 | length 58.3
  Top Layer w0.2: U5.14 50,18.373 53.937,14.436 75.921,14.436 76.683,15.198 U2.2 76.683,18.07 71.476,23.277 71.476,31.213 73.241,32.978 75.389,32.978 76.397,33.986 76.397,35.359 78.588,37.55 U1.2
NetTP7_1: TP7.1 U1.1 U5.22 | length 23.3
  Top Layer w0.2: U5.22 61.454,27.263 TP7.1 77.298,37.92 U1.1
NetTP10_1: TP10.1 U2.1 U5.21 | length 24.1
  Top Layer w0.2: U5.21 66.269,25.993 67.285,24.977 67.285,19.549 TP10.1 U2.1
OSC1: C10.1 G1.2 U5.9 | length 10.1
  Top Layer w0.2: C10.1 43.06,26.032 G1.2 43.199,25.643 44.119,24.723 U5.9
OSC2: C11.1 G1.4 U5.10 | length 13
  Top Layer w0.2: C11.1 40.583,21.277 G1.4 40.699,21.508 41.28,22.089 41.395,22.089 42.759,23.453 U5.10
PGEC1: U5.5 | length 30.4
  Top Layer w0.2: 42.36,56.175 42.2,56.015 42.2,39.267 46.711,34.756 46.711,30.819 47.727,29.803 U5.5
PGED1: U5.4 | length 27.3
  Top Layer w0.2: 44.9,56.175 44.9,37.583 47.346,35.137 47.346,32.577 48.85,31.073 U5.4
PWM1a: J1.11 J3.11 | length 70.8
  Bottom Layer w0.2: J3.11 35.555,6.755 103.495,6.755 J1.11
PWM1b: J1.13 J3.13 | length 71.7
  Top Layer w0.2: J3.13 39.205,9.875 v2(95.825,9.875)
  Bottom Layer w0.2: v2(95.825,9.875) 104.925,9.875 J1.13
PWM2a: J1.12 J3.12 | length 70.8
  Bottom Layer w0.2: J3.12 35.555,4.215 103.495,4.215 J1.12
PWM2b: J1.14 J3.14 | length 70.9
  Top Layer w0.2: J3.14 37.09,4.935 37.81,4.215 106.035,4.215 J1.14
Reference: J1.9 J3.9 R12.1 TP5.1 | length 107.3
  Top Layer w0.2: R12.1 14.2,31.625 v2(16.125,31.625) ; v2(19.6,31.7) 21.15,31.7 23.047,29.803 TP5.1 29.95,24.72 29.95,9.82 J3.9 33.015,6.755 100.955,6.755 J1.9
  Bottom Layer w0.2: v2(16.125,31.625) 16.163,31.662 19.562,31.662 v2(19.6,31.7)
Reset: C12.2 R20.1 R21.1 S1.14 | length 33.7
  Top Layer w0.2: 52.52,56.175 52.52,53.995 51.267,52.742 R21.1 ; R20.1 54.474,37.523 51.736,40.261 51.736,40.732 R21.1 ; S1.14@63.931,40.126 57.431,40.126 56.356,41.201 C12.2 R21.1
Vmot+: C2.2 J1.3 Q1.3 Q2.4 TP4.1 U1.11 | length 63.6
  Top Layer w0.2: Q2.4@95.61,35.728 95.61,35.694 98.326,32.978 Q2.4
  Top Layer w0.75: C2.2 78.103,46.186 78.253,46.036 78.253,45.432 78.693,44.993 80.689,44.993 81.128,44.554 81.128,42.352 82.374,41.106 Q1.3 91.937,39.401 Q2.4@95.61,35.728 ; Q2.4 v2(102.337,32.978)
  Bottom Layer w0.75: J1.3 94.34,9.79 102.337,17.787 v2(102.337,32.978) TP4.1@105.004,32.978
Vmot-: C5.1 J1.5 Q3.3 Q4.4 TP11.1 U2.11 | length 45.3
  Top Layer w0.2: Q3.3 Q3.3@92.28,20.229 ; Q4.4@96.671,16.854 Q4.4 Q4.4@96.88,13.497
  Top Layer w0.75: C5.1 74.814,25.866 74.964,25.716 74.964,25.355 76.233,24.086 78.211,24.086 79.223,23.074 U2.11 ; U2.11@79.223,22.406 79.223,21.167 79.731,20.659 Q3.3 91.998,20.511 93.623,20.511 95.979,18.155 95.979,17.512 96.637,16.854 Q4.4@96.671,16.854 ; J1.5 Q4.4@96.88,13.497 ; Q4.4 TP11.1
WmesPU: J3.6 R11.1 TP1.1 | length 56.2
  Top Layer w0.2: R11.1 20.168,49.742 21.525,48.385 21.525,36.955 TP1.1 ; v2(21.375,22.175) 21.375,15.075 25.675,10.775 25.675,6.219 26.674,5.22 J3.6
  Bottom Layer w0.2: v2(21.375,22.175) 21.375,30.121 TP1.1
pads on no net: J1.1 J1.2 J1.4 J1.6 J1.7 J1.8 J2.13 J2.14 J3.1 J3.2 J3.3 J3.5 J3.7 U1.8 U1.9 U1.10 U1.14 U2.8 U2.9 U2.10 U2.14 U4.5 U4.6 U4.7 U5.12 U5.15 U5.16 U5.17 U5.18 U5.23 U5.24 U5.25 U5.26

## Polygon pours and split planes (outlines as drawn)
GND on Top Layer "GND_L01_P000" (solid, pour order 0): 125.499,62.49 125.372,62.363 -8.74,62.363 -8.74,-2.661 -8.994,-2.915 -8.613,-3.296 126.134,-3.296
GND on Bottom Layer "GND_L02_P001" (solid, pour order 1): 125.879,62.109 125.752,61.982 -8.36,61.982 -8.36,-3.042 -8.614,-3.296 -8.233,-3.677 126.514,-3.677

## Silkscreen, mask and mechanical layers (free items; w line width, h text height)
Top Overlay:
  text "TP4 REGL - EIND" at 1.1,57.925 h1
  text "BSH/DSY" at 1.1,56.15 h1
  text "Speed m" at 32.15,42.658 h1
  text "GND" at 115.325,39.35 h1
  text "Pos m" at 32.146,38.061 h1
  text "PWM A" at 66.8,34.675 h1
  text "Speed um" at 32,33.583 h1
  text "GND" at 115.275,30.275 h1
  text "+Vmot" at 104.454,29.379 h1.52
  text "Pot um" at 31.95,29.2 h1
  text "Pos um" at 31.925,25.2 h1
  text "GND" at 115.275,21.45 h1
  text "PWM B" at 64.325,18.05 h1
  text "Pos m" at 32.15,16.825 h1
  text "GND" at 115.35,12.225 h1
  text "-Vmot" at 104.554,11.504 h1.52
Outline:
  the board outline again, w0.254

## Text inside footprints (layer, text, board x,y; h text height)
D1: Top 3D Body "RefDes2" at 76.492,48.726 h1.27
D2: Top 3D Body "RefDes2" at 73.19,28.406 h1.27